# EAGLE board uPlaits_SE_Front_Panel (EAGLE 9.6.2)
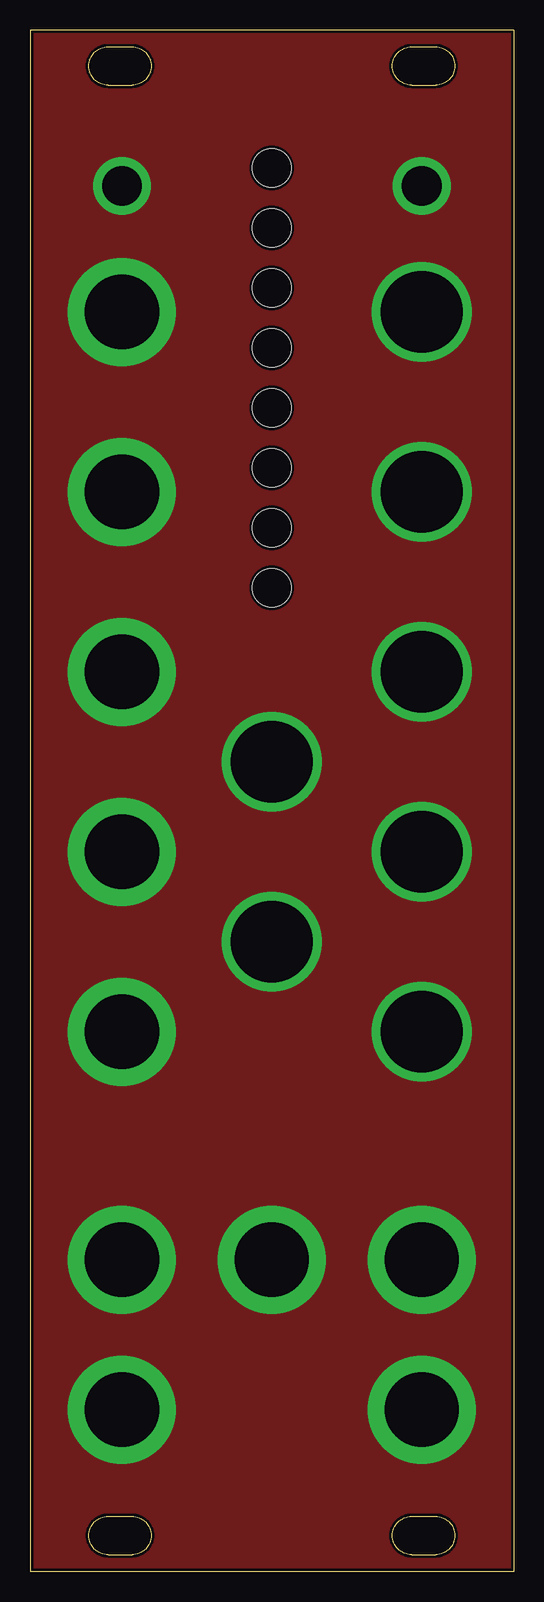
[diagram p0: board, top side]
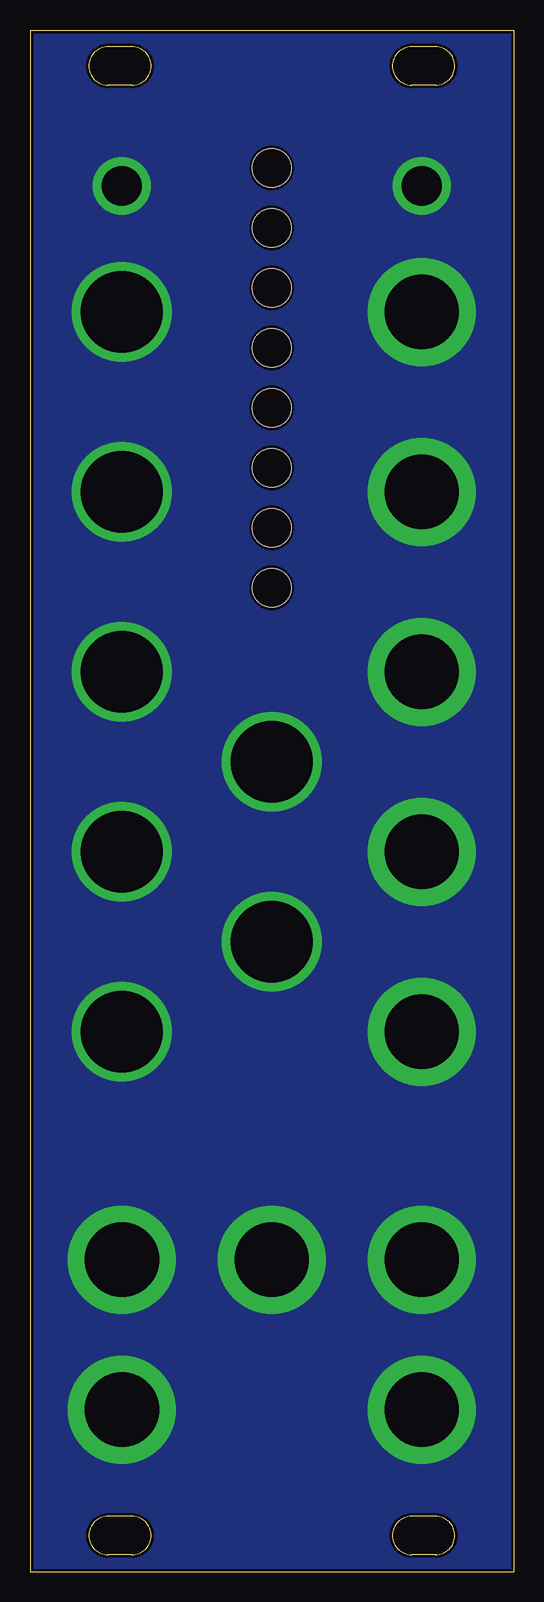
[diagram p1: board, bottom side, seen from below]

Size 40.3 x 128.5 mm. Coordinates in mm from the lower left corner, seen from the top.
Outline: 40.3,128.5 0,128.5 0,0 40.3,0 40.3,128.5
Outline: 6.5,123.9 arc-180 6.5,127.1 8.5,127.1 arc-180 8.5,123.9 6.5,123.9
Outline: 6.5,1.4 arc-180 6.5,4.6 8.5,4.6 arc-180 8.5,1.4 6.5,1.4
Outline: 31.8,1.4 arc-180 31.8,4.6 33.8,4.6 arc-180 33.8,1.4 31.8,1.4
Outline: 31.8,123.9 arc-180 31.8,127.1 33.8,127.1 arc-180 33.8,123.9 31.8,123.9
Copper layers (1*16): Top 0.035mm / dielectric 1.5mm / Bottom 0.035mm
Design rules "default *": minimum track width 10mil, minimum drill 24mil, track to track 8mil, track to pad 8mil, pad to pad 8mil, via to via 8mil, smd to smd 8mil, copper to edge 0.25mm, drill to drill 8mil, minimum pad ring 6mil, minimum via ring 6mil, stop-mask expansion 0mil, vias tented up to drill 0mil, thermal gap 10mil
Holes 3.2 mm at 20.15,82 20.15,87 20.15,92 20.15,97 20.15,102 20.15,107 20.15,112 20.15,117

## Placement (x,y rotation side)
E$1  [NEG-OUT]  15.15,13.5 90 top
E$2  [NEG-AUX]  25.15,13.5 270 top

## Library data of the parts
E$1 E$2 = uPlaits_SE_Library

## Tracks (layer width: path | path; a pad name or v marks a point on that pad's centre or on a via)
GND  (via drill 3.3 pad 4.8, 6.2 pad 9, 6.8 pad 8.3)
  other vias: 32.65,13.5 32.65,26 20.15,26 7.65,26 7.65,13.5 20.15,67.5 32.65,105 32.65,90 32.65,75 32.65,60 20.15,52.5 7.65,90 7.65,75 32.65,45 7.65,60 7.65,105 7.65,45 32.65,115.5 7.65,115.5
  pour Top (no thermals): 0,128.5 40.3,128.5 40.3,0 0,0
  pour Bottom (no thermals): 0,128.5 40.3,128.5 40.3,0 0,0

## Text on the board
tStop: TD-UPSE-C | tall-dog.com | V/OCT | FREQ | HARMO | HARMO | TIMBRE | MORPH | FM | MODEL | TRIG | LEVEL | μPlaits | SE
bStop: µPlaits SE / Front Panel / TD-UPSE-C-FP / CC BY-SA 4.0 / 2024-07-06 / tall-dog.com | Panel / derived / from work by / Émilie Gillet / of Mutable / Instruments